# EAGLE board Geiger_Counter-Panel-v40 (EAGLE 6.6.0)
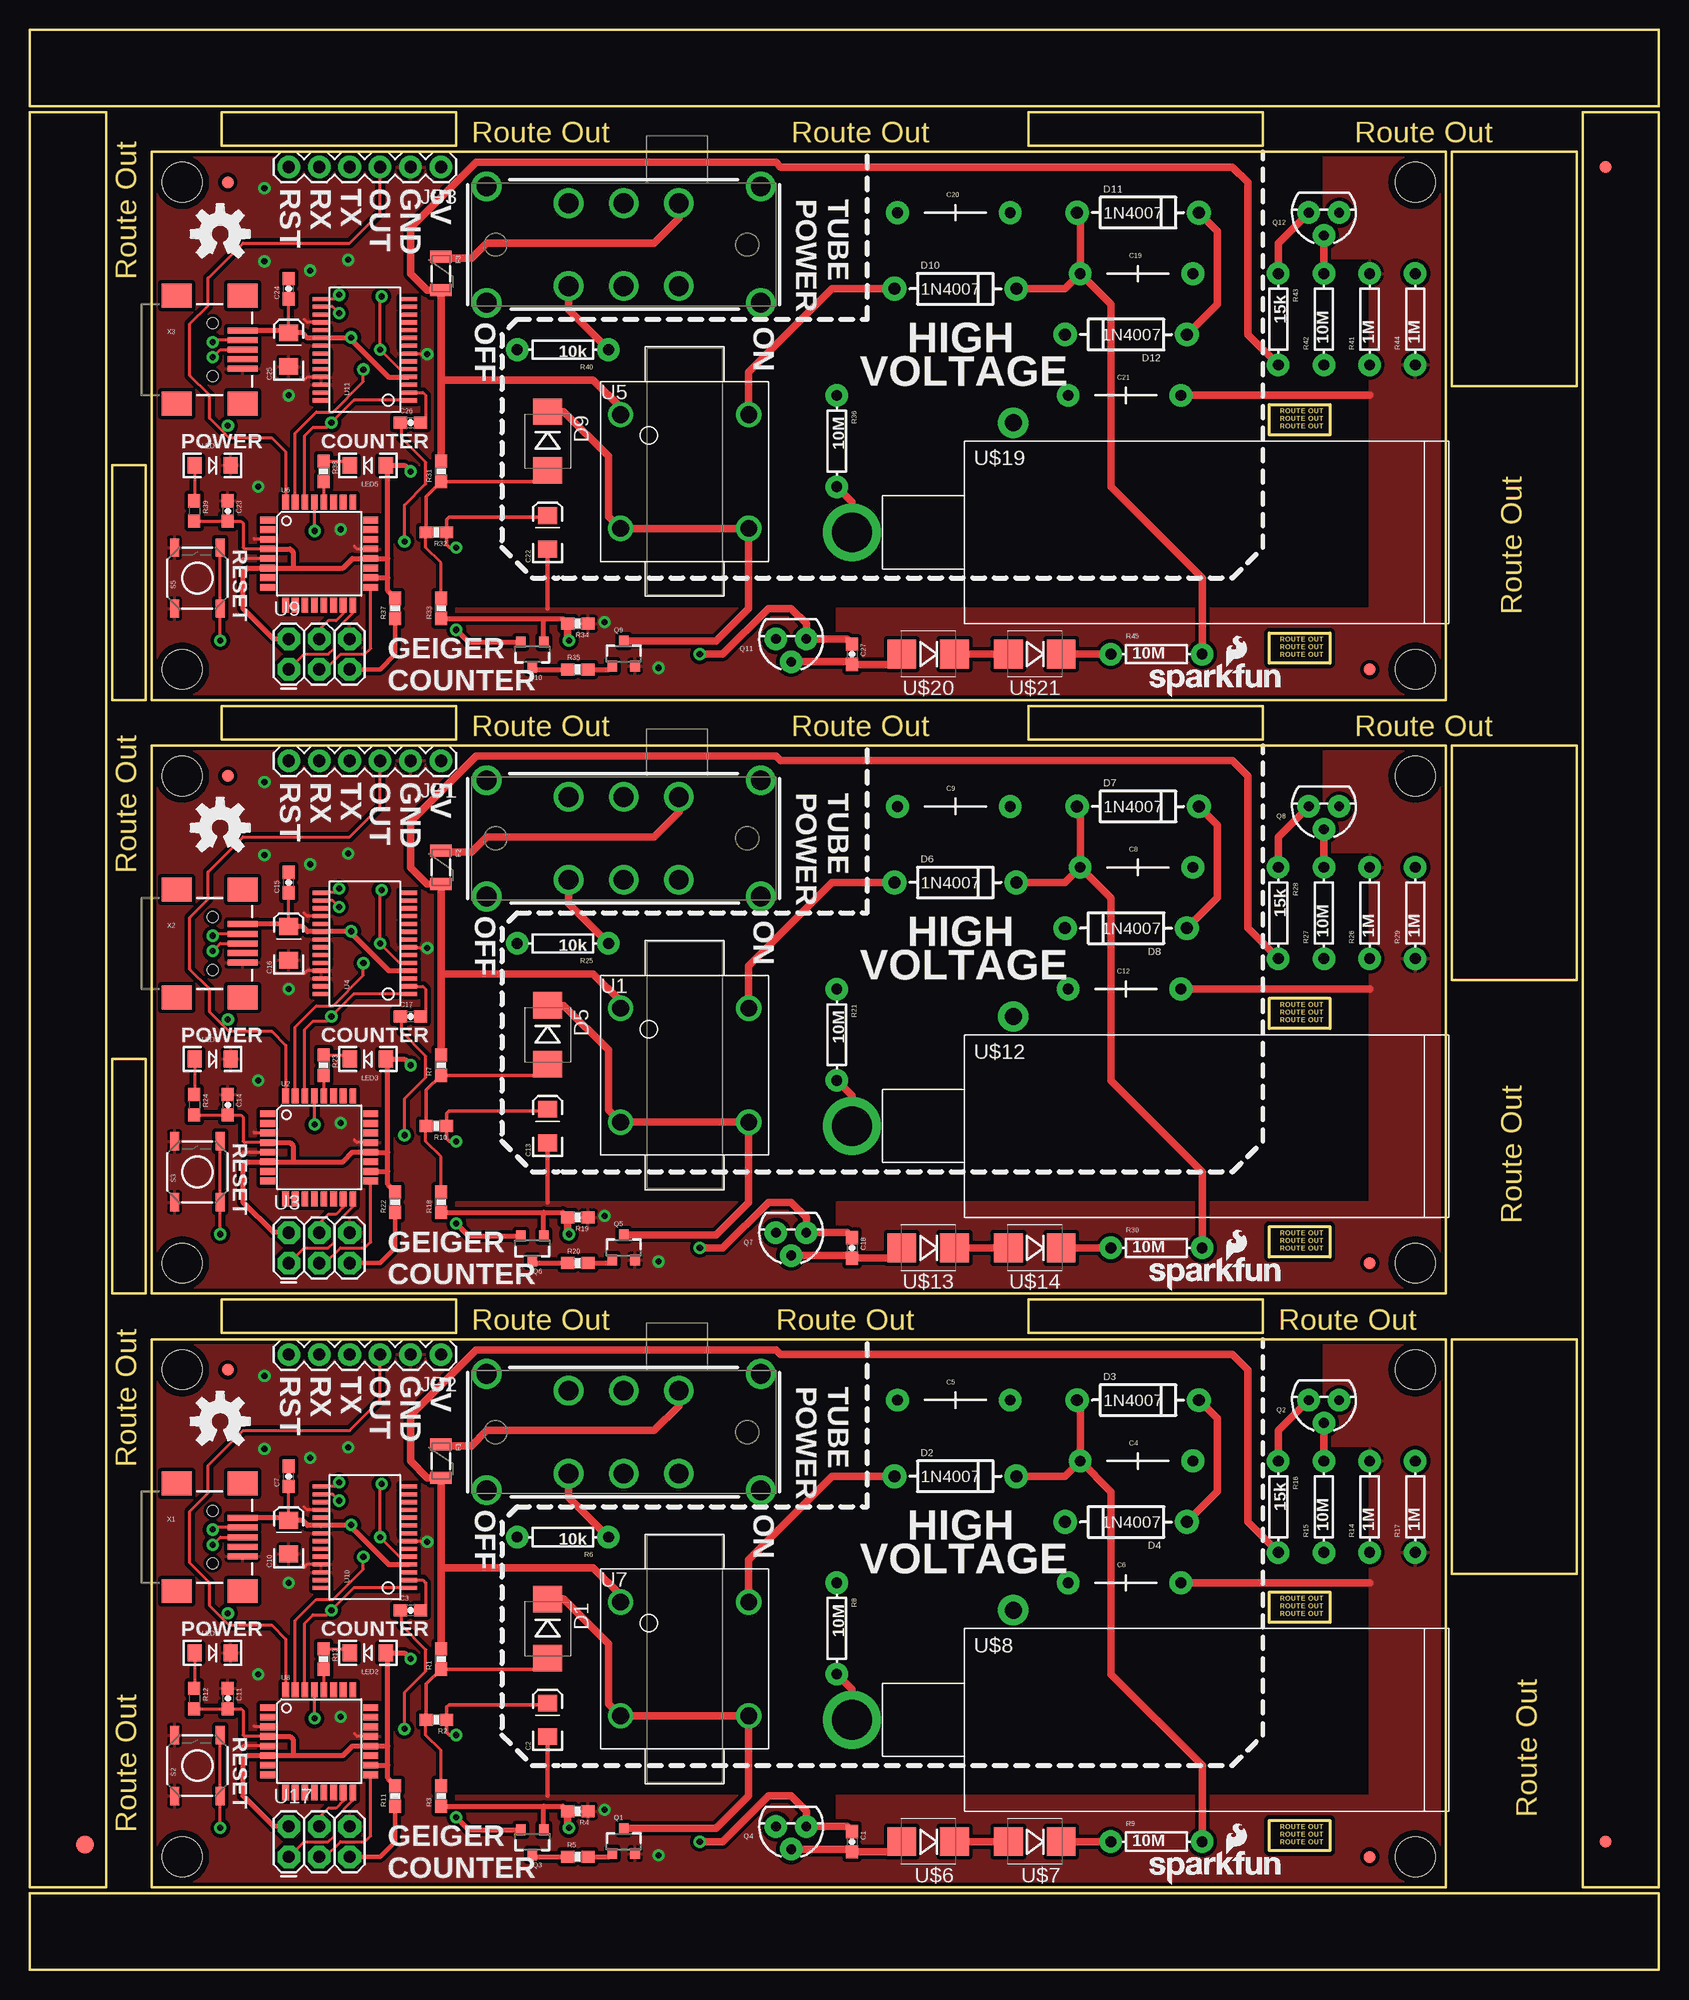
[diagram p0: board, top side]
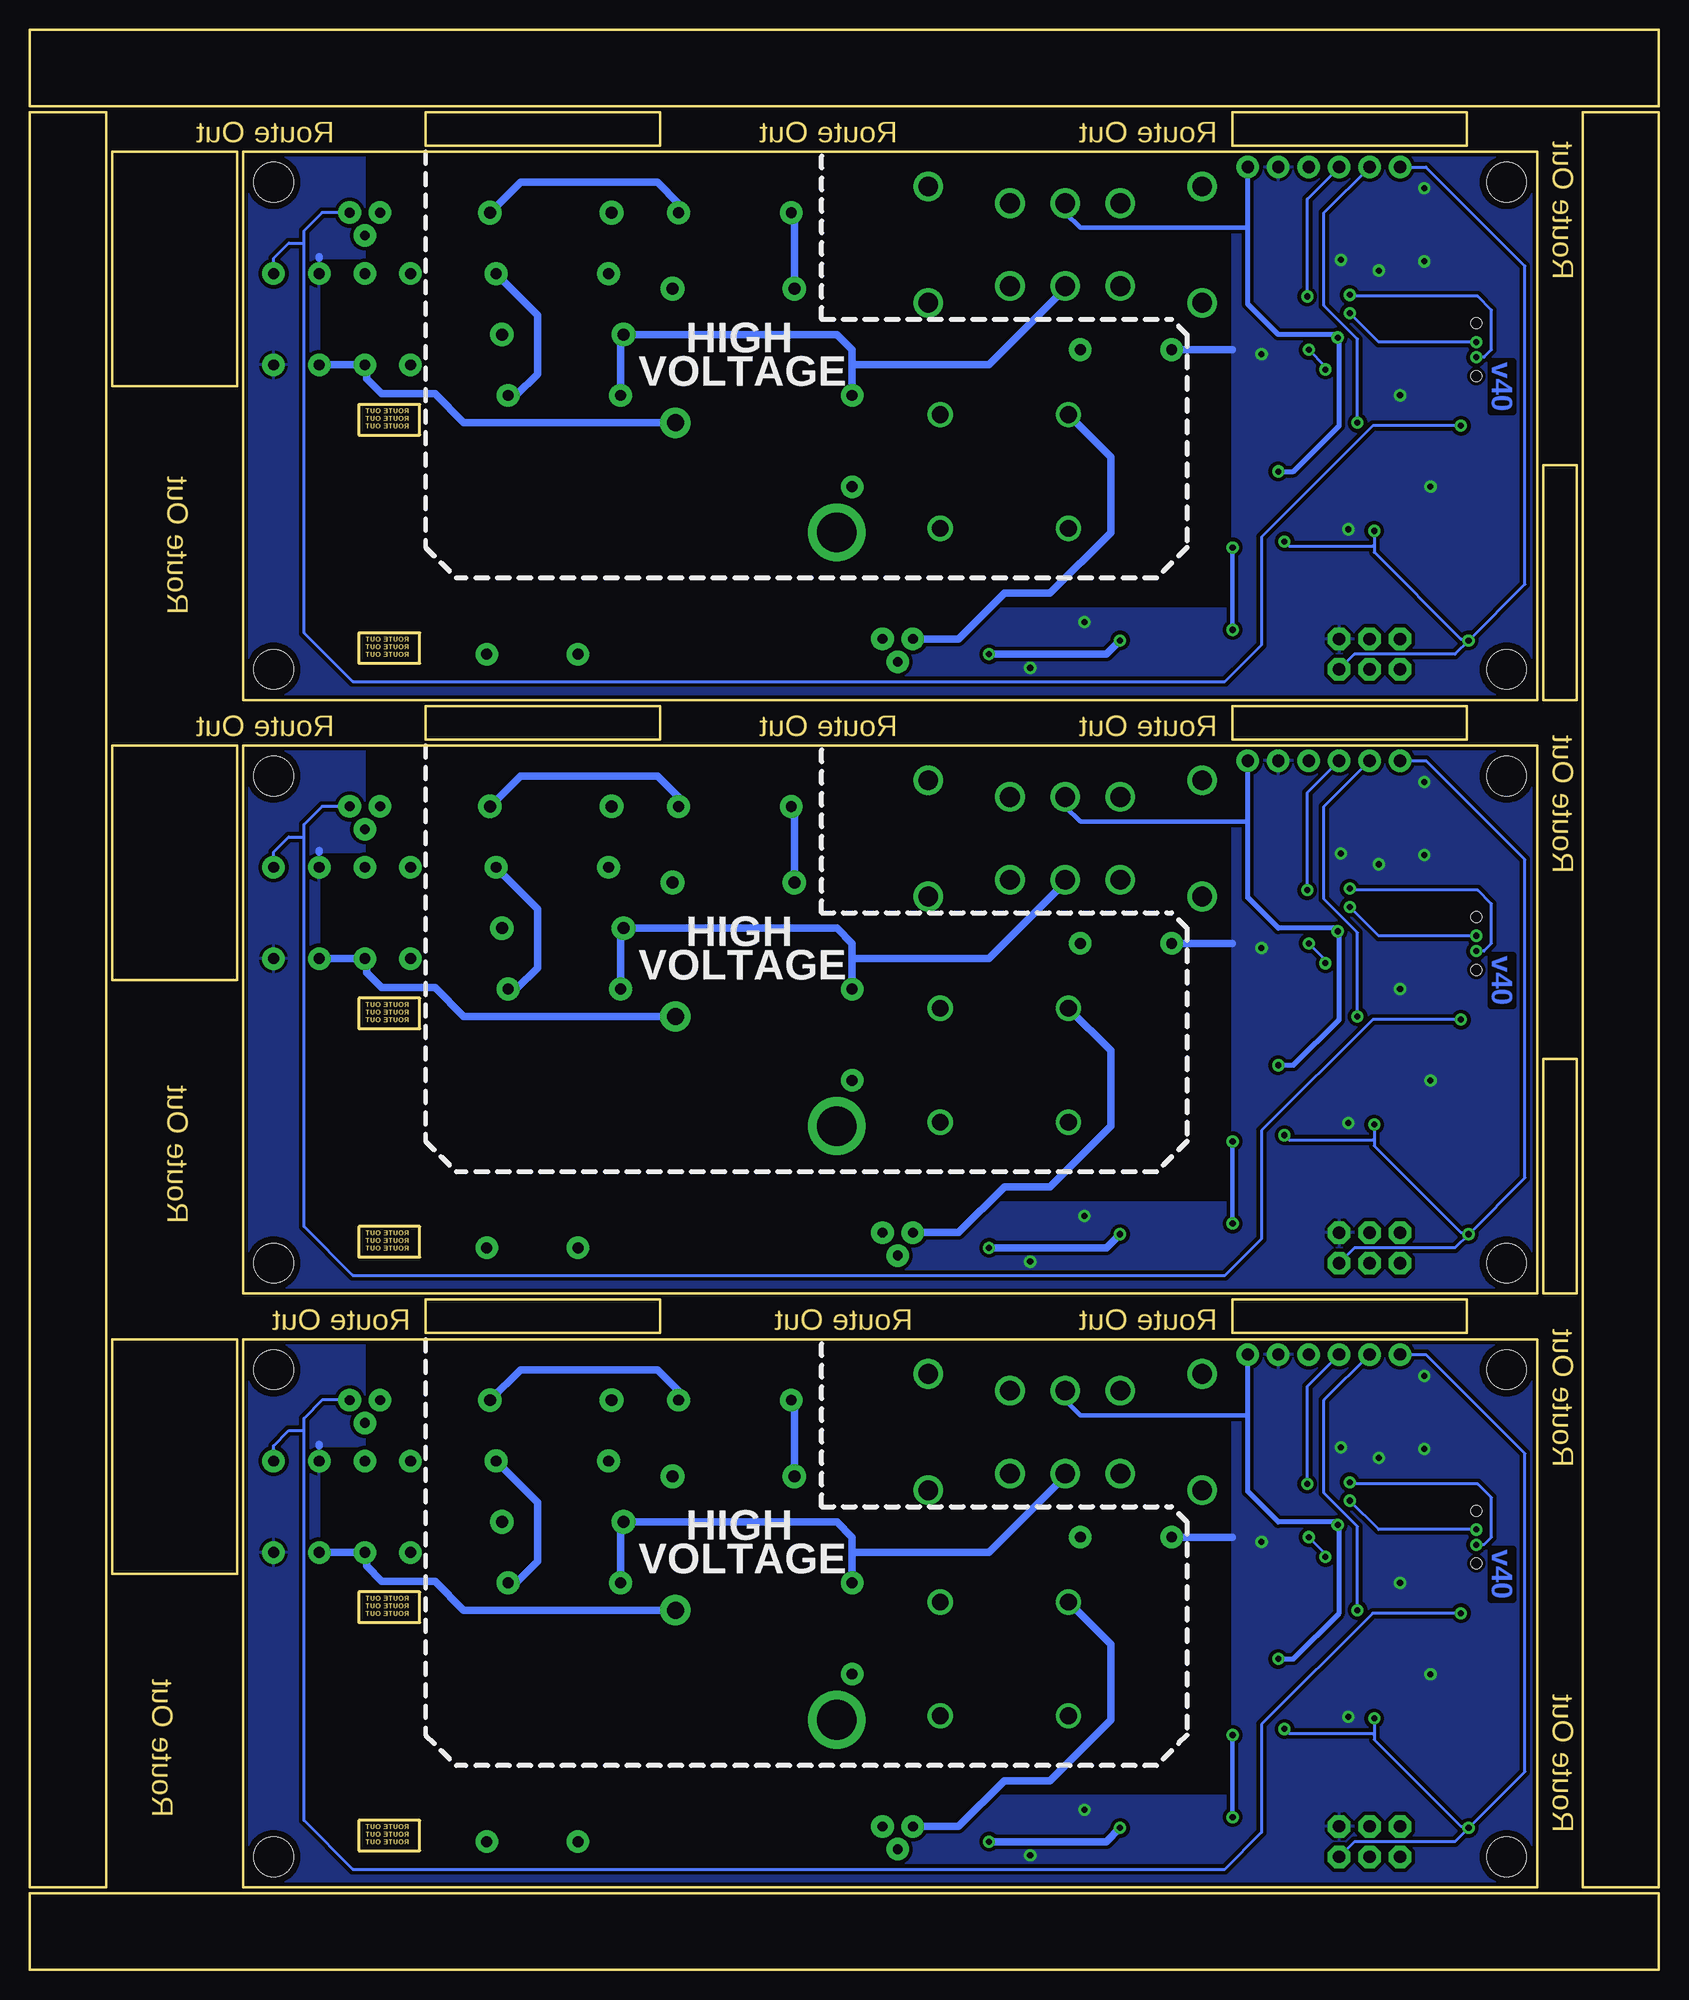
[diagram p1: board, bottom side, seen from below]

Size 135.89 x 161.8 mm. Coordinates in mm from the lower left corner, seen from the top.
Outline: 6.35,79.25 6.35,6.86 0,6.86 0,29.72
Outline: 135.89,79.25 135.89,6.86 129.54,6.86 129.54,29.72
Outline: 129.54,25.91 129.54,154.94 135.89,154.94 135.89,75.44
Outline: 0,23.37 0,154.94 6.35,154.94 6.35,72.9
Outline: 82.55,0 0,0 0,6.35 33.02,6.35
Outline: 82.55,155.45 0,155.45 0,161.8 33.02,161.8
Outline: 29.21,161.8 135.89,161.8 135.89,155.45 78.74,155.45
Outline: 27.69,6.35 135.89,6.35 135.89,0 77.22,0
Outline: 10.16,6.86 118.11,6.86 118.11,52.58 10.16,52.58 10.16,6.86
Outline: 103.38,31.5 108.46,31.5 108.46,28.96 103.38,28.96 103.38,31.5
Outline: 103.38,12.45 108.46,12.45 108.46,9.91 103.38,9.91 103.38,12.45
Outline: 10.16,56.39 118.11,56.39 118.11,102.11 10.16,102.11 10.16,56.39
Outline: 103.38,81.03 108.46,81.03 108.46,78.49 103.38,78.49 103.38,81.03
Outline: 103.38,61.98 108.46,61.98 108.46,59.44 103.38,59.44 103.38,61.98
Outline: 10.16,105.92 118.11,105.92 118.11,151.64 10.16,151.64 10.16,105.92
Outline: 103.38,130.56 108.46,130.56 108.46,128.02 103.38,128.02 103.38,130.56
Outline: 103.38,111.51 108.46,111.51 108.46,108.97 103.38,108.97 103.38,111.51
Outline: 118.62,132.08 129.03,132.08 129.03,151.64 118.62,151.64 118.62,132.08
Outline: 118.62,82.55 129.03,82.55 129.03,102.11 118.62,102.11 118.62,82.55
Outline: 118.62,33.02 129.03,33.02 129.03,52.58 118.62,52.58 118.62,33.02
Outline: 102.87,152.15 102.87,154.94 83.31,154.94 83.31,152.15 102.87,152.15
Outline: 102.87,102.62 102.87,105.41 83.31,105.41 83.31,102.62 102.87,102.62
Outline: 102.87,53.09 102.87,55.88 83.31,55.88 83.31,53.09 102.87,53.09
Outline: 35.56,53.09 35.56,55.88 16,55.88 16,53.09 35.56,53.09
Outline: 35.56,102.62 35.56,105.41 16,105.41 16,102.62 35.56,102.62
Outline: 35.56,152.15 35.56,154.94 16,154.94 16,152.15 35.56,152.15
Outline: 6.86,105.92 9.65,105.92 9.65,125.48 6.86,125.48 6.86,105.92
Outline: 6.86,56.39 9.65,56.39 9.65,75.95 6.86,75.95 6.86,56.39
Copper layers (1*16): Top 0.035mm / dielectric 1.5mm / Bottom 0.035mm
Design rules "SparkFun-2-layer": minimum track width 7mil, minimum drill 15mil, track to track 8mil, track to pad 8mil, pad to pad 8mil, via to via 8mil, smd to smd 8mil, copper to edge 8mil, drill to drill 8mil, minimum pad ring 12mil, minimum via ring 10mil, stop-mask expansion 4mil, vias tented up to drill 20mil, thermal gap 10mil

## Footprints (pad centres in the part's own frame; a part is rotated, then mirrored left to right if it is on the bottom)
0603-CAP = smd 1.1 x 1: 1 -0.85,0; 2 0.85,0
EIA3216 = smd 1.4 x 1.6: A 1.4,0; C -1.4,0
CAP-PTH-LARGE = drill 0.9 pad 1.905: 1 -4.826,0; 2 4.572,0
DIODE-HV = smd 2.2 x 2.4: A 2.454,0; C -2.454,0
DIODE-1N4001 = drill 1 pad 1.981: A -5.08,0; C 5.08,0
FIDUCIAL-1.5X3 = smd 1.5 x 1.5: 1 0,0
FIDUCIAL-1X2 = smd 1 x 1: 1 0,0
PTC-1206 = smd 1 x 1.8: 1 -1.4,0; 2 1.4,0
1X06 = drill 1.016 pad 1.88: 1 0,0; 2 2.54,0; 3 5.08,0; 4 7.62,0; 5 10.16,0; 6 12.7,0
LED-1206 = smd 1.2 x 1.4: A -1.5,0; C 1.5,0
SOT23-3 = smd 0.8 x 0.9: 1 -0.95,-1; 2 0.95,-1; 3 0,1.1
TO-92 = drill 0.813 pad 1.88: 1 -1.27,0; 2 0,1.905; 3 1.27,0
0603-RES = smd 1.1 x 1: 1 -0.85,0; 2 0.85,0
AXIAL-0.3 = drill 0.9 pad 1.88: P$1 -3.81,0; P$2 3.81,0
0603 = smd 1.1 x 1: 1 -0.85,0; 2 0.85,0
GPI-152-3013 = drill 1.65: 10 -4.6,3.455; 11 -4.6,-3.455; 20 4.6,3.455; 21 4.6,-3.455; C@1 0,3.455; C@2 0,-3.455; P$7 11.43,4.85; P$8 -11.43,4.85; P$9 -11.43,-4.85; P$10 11.43,-4.85
TACTILE_SWITCH_SMD = smd 1.524 x 0.762: 1 -2.54,1.905; 2 2.54,1.905; 3 -2.54,-1.905; 4 2.54,-1.905
TRANSFORMER = drill 1.4: 1 -5.35,4.75; 2 -5.35,-4.75; 3 5.35,-4.75; 4 5.35,4.75
TQFP32-08 = smd 1.27 x 0.559: 1 -4.293,2.8; 2 -4.293,2; 3 -4.293,1.2; 4 -4.293,0.4; 5 -4.293,-0.4; 6 -4.293,-1.2; 7 -4.293,-2; 8 -4.293,-2.8; 17 4.293,-2.8; 18 4.293,-2; 19 4.293,-1.2; 20 4.293,-0.4; 21 4.293,0.4; 22 4.293,1.2; 23 4.293,2; 24 4.293,2.8 | smd 0.559 x 1.27: 9 -2.8,-4.293; 10 -2,-4.293; 11 -1.2,-4.293; 12 -0.4,-4.293; 13 0.4,-4.293; 14 1.2,-4.293; 15 2,-4.293; 16 2.8,-4.293; 25 2.8,4.293; 26 2,4.293; 27 1.2,4.293; 28 0.4,4.293; 29 -0.4,4.293; 30 -1.2,4.293; 31 -2,4.293; 32 -2.8,4.293
2X3 = drill 1.016 pad 1.88 octagon: 1 0,0; 2 0,2.54; 3 2.54,0; 4 2.54,2.54; 5 5.08,0; 6 5.08,2.54
SSOP28DB = smd 0.348 x 1.397: 1 -4.225,-3.656; 2 -3.575,-3.656; 3 -2.925,-3.656; 4 -2.275,-3.656; 5 -1.625,-3.656; 6 -0.975,-3.656; 7 -0.325,-3.656; 8 0.325,-3.656; 9 0.975,-3.656; 10 1.625,-3.656; 11 2.275,-3.656; 12 2.925,-3.656; 13 3.575,-3.656; 14 4.225,-3.656; 15 4.225,3.656; 16 3.575,3.656; 17 2.925,3.656; 18 2.275,3.656; 19 1.625,3.656; 20 0.975,3.656; 21 0.325,3.656; 22 -0.325,3.656; 23 -0.975,3.656; 24 -1.625,3.656; 25 -2.275,3.656; 26 -2.925,3.656; 27 -3.575,3.656; 28 -4.225,3.656
STAND-OFF = hole 3.302: 0,0
SMB-DIODE = smd 2.4 x 2.4: A 2.2,0; C -2.2,0
GEIGER_TUBE = drill 1.4 pad 2.54: GND 13.462,9.144 | drill 3.302 pad 4.826: VCC 0,0
USB-MINIB = smd 2.5 x 0.5: D+ 2.5,0; D- 2.5,0.8; GND 2.5,-1.6; ID 2.5,-0.8; VBUS 2.5,1.6 | smd 2.5 x 2: MTN1 -3,4.5; MTN2 2.5,4.5; MTN3 -3,-4.5; MTN4 2.5,-4.5 | hole 0.9: 0,2.2; 0,-2.2

## Placement (x,y rotation side)
C1  0.1uF  [0603-CAP]  68.58,10.67 270 top
C2  10uF  [EIA3216]  43.18,20.83 90 top
C3  0.1uF  [0603-CAP]  31.75,29.97 0 top
C4  0.01uF  [CAP-PTH-LARGE]  92.44,42.42 0 top
C5  0.01uF  [CAP-PTH-LARGE]  77.2,47.5 0 top
C6  0.01uF  [CAP-PTH-LARGE]  91.44,32.26 0 top
C7  0.1uF  [0603-CAP]  21.59,41.15 90 top
C8  0.01uF  [CAP-PTH-LARGE]  92.44,91.95 0 top
C9  0.01uF  [CAP-PTH-LARGE]  77.2,97.03 0 top
C10  10uF  [EIA3216]  21.59,36.07 90 top
C11  0.1uF  [0603-CAP]  16.51,22.61 270 top
C12  0.01uF  [CAP-PTH-LARGE]  91.44,81.79 0 top
C13  10uF  [EIA3216]  43.18,70.36 90 top
C14  0.1uF  [0603-CAP]  16.51,72.14 270 top
C15  0.1uF  [0603-CAP]  21.59,90.68 90 top
C16  10uF  [EIA3216]  21.59,85.6 90 top
C17  0.1uF  [0603-CAP]  31.75,79.5 0 top
C18  0.1uF  [0603-CAP]  68.58,60.2 270 top
C19  0.01uF  [CAP-PTH-LARGE]  92.44,141.48 0 top
C20  0.01uF  [CAP-PTH-LARGE]  77.2,146.56 0 top
C21  0.01uF  [CAP-PTH-LARGE]  91.44,131.32 0 top
C22  10uF  [EIA3216]  43.18,119.89 90 top
C23  0.1uF  [0603-CAP]  16.51,121.67 270 top
C24  0.1uF  [0603-CAP]  21.59,140.21 90 top
C25  10uF  [EIA3216]  21.59,135.13 90 top
C26  0.1uF  [0603-CAP]  31.75,129.03 0 top
C27  0.1uF  [0603-CAP]  68.58,109.73 270 top
D1  1N4007  [DIODE-HV]  43.18,28.45 270 top
D2  1N4007  [DIODE-1N4001]  77.2,41.15 0 top
D3  1N4007  [DIODE-1N4001]  92.44,47.5 0 top
D4  1N4007  [DIODE-1N4001]  91.44,37.34 180 top
D5  1N4007  [DIODE-HV]  43.18,77.98 270 top
D6  1N4007  [DIODE-1N4001]  77.2,90.68 0 top
D7  1N4007  [DIODE-1N4001]  92.44,97.03 0 top
D8  1N4007  [DIODE-1N4001]  91.44,86.87 180 top
D9  1N4007  [DIODE-HV]  43.18,127.51 270 top
D10  1N4007  [DIODE-1N4001]  77.2,140.21 0 top
D11  1N4007  [DIODE-1N4001]  92.44,146.56 0 top
D12  1N4007  [DIODE-1N4001]  91.44,136.4 180 top
E$1  [FIDUCIAL-1.5X3]  4.57,10.41 0 top
E$2  [FIDUCIAL-1X2]  131.44,10.67 0 top
E$3  [FIDUCIAL-1X2]  131.44,150.37 180 top
F1  PTCSMD  [PTC-1206]  34.29,42.42 270 top
F2  PTCSMD  [PTC-1206]  34.29,91.95 270 top
F3  PTCSMD  [PTC-1206]  34.29,141.48 270 top
FID1  FIDUCIAL1X2  [FIDUCIAL-1X2]  16.51,50.04 0 top
FID2  FIDUCIAL1X2  [FIDUCIAL-1X2]  111.76,9.4 0 top
FID3  FIDUCIAL1X2  [FIDUCIAL-1X2]  16.51,99.57 0 top
FID4  FIDUCIAL1X2  [FIDUCIAL-1X2]  111.76,58.93 0 top
FID5  FIDUCIAL1X2  [FIDUCIAL-1X2]  16.51,149.1 0 top
FID6  FIDUCIAL1X2  [FIDUCIAL-1X2]  111.76,108.46 0 top
JP1  debug  [1X06]  34.29,100.84 180 top
JP2  debug  [1X06]  34.29,51.31 180 top
JP3  debug  [1X06]  34.29,150.37 180 top
LED1  Red  [LED-1206]  15.24,26.42 0 top
LED2  Green  [LED-1206]  28.19,26.42 180 top
LED3  Green  [LED-1206]  28.19,75.95 180 top
LED4  Red  [LED-1206]  15.24,75.95 0 top
LED5  Green  [LED-1206]  28.19,125.48 180 top
LED6  Red  [LED-1206]  15.24,125.48 0 top
LOGO1  OSHW-LOGOM  [OSHW-LOGO-M]  15.88,45.72 0 top
LOGO2  SFE_LOGO_NAME_FLAME.1_INCH  [SFE_LOGO_NAME_FLAME_.1]  92.96,6.99 0 top
LOGO3  OSHW-LOGOM  [OSHW-LOGO-M]  15.88,95.25 0 top
LOGO4  SFE_LOGO_NAME_FLAME.1_INCH  [SFE_LOGO_NAME_FLAME_.1]  92.96,56.52 0 top
LOGO5  OSHW-LOGOM  [OSHW-LOGO-M]  15.88,144.78 0 top
LOGO6  SFE_LOGO_NAME_FLAME.1_INCH  [SFE_LOGO_NAME_FLAME_.1]  92.96,106.05 0 top
Q1  MPSA42  [SOT23-3]  49.53,10.67 0 top
Q2  MPSA18  [TO-92]  107.95,47.5 180 top
Q3  MMBT4403  [SOT23-3]  41.91,10.67 180 top
Q4  MPSA18  [TO-92]  63.5,11.94 180 top
Q5  MPSA42  [SOT23-3]  49.53,60.2 0 top
Q6  MMBT4403  [SOT23-3]  41.91,60.2 180 top
Q7  MPSA18  [TO-92]  63.5,61.47 180 top
Q8  MPSA18  [TO-92]  107.95,97.03 180 top
Q9  MPSA42  [SOT23-3]  49.53,109.73 0 top
Q10  MMBT4403  [SOT23-3]  41.91,109.73 180 top
Q11  MPSA18  [TO-92]  63.5,111 180 top
Q12  MPSA18  [TO-92]  107.95,146.56 180 top
R1  1k  [0603-RES]  34.29,25.91 90 top
R2  1k  [0603-RES]  33.91,20.83 180 top
R3  100k  [0603-RES]  34.29,14.48 90 top
R4  150k  [0603-RES]  45.72,13.21 180 top
R5  1.8k  [0603-RES]  45.72,9.4 0 top
R6  10k  [AXIAL-0.3]  44.45,36.07 180 top
R7  1k  [0603-RES]  34.29,75.44 90 top
R8  10M  [AXIAL-0.3]  67.31,28.45 270 top
R9  10M  [AXIAL-0.3]  93.98,10.67 0 top
R10  1k  [0603-RES]  33.91,70.36 180 top
R11  10k  [0603-RES]  30.48,14.48 90 top
R12  330  [0603]  13.72,22.61 270 top
R13  330  [0603-RES]  24.51,25.91 270 top
R14  1M  [AXIAL-0.3]  111.76,38.61 90 top
R15  10M  [AXIAL-0.3]  107.95,38.61 90 top
R16  15k  [AXIAL-0.3]  104.14,38.61 270 top
R17  1M  [AXIAL-0.3]  115.57,38.61 90 top
R18  100k  [0603-RES]  34.29,64.01 90 top
R19  150k  [0603-RES]  45.72,62.74 180 top
R20  1.8k  [0603-RES]  45.72,58.93 0 top
R21  10M  [AXIAL-0.3]  67.31,77.98 270 top
R22  10k  [0603-RES]  30.48,64.01 90 top
R23  330  [0603-RES]  24.51,75.44 270 top
R24  330  [0603]  13.72,72.14 270 top
R25  10k  [AXIAL-0.3]  44.45,85.6 180 top
R26  1M  [AXIAL-0.3]  111.76,88.14 90 top
R27  10M  [AXIAL-0.3]  107.95,88.14 90 top
R28  15k  [AXIAL-0.3]  104.14,88.14 270 top
R29  1M  [AXIAL-0.3]  115.57,88.14 90 top
R30  10M  [AXIAL-0.3]  93.98,60.2 0 top
R31  1k  [0603-RES]  34.29,124.97 90 top
R32  1k  [0603-RES]  33.91,119.89 180 top
R33  100k  [0603-RES]  34.29,113.54 90 top
R34  150k  [0603-RES]  45.72,112.27 180 top
R35  1.8k  [0603-RES]  45.72,108.46 0 top
R36  10M  [AXIAL-0.3]  67.31,127.51 270 top
R37  10k  [0603-RES]  30.48,113.54 90 top
R38  330  [0603-RES]  24.51,124.97 270 top
R39  330  [0603]  13.72,121.67 270 top
R40  10k  [AXIAL-0.3]  44.45,135.13 180 top
R41  1M  [AXIAL-0.3]  111.76,137.67 90 top
R42  10M  [AXIAL-0.3]  107.95,137.67 90 top
R43  15k  [AXIAL-0.3]  104.14,137.67 270 top
R44  1M  [AXIAL-0.3]  115.57,137.67 90 top
R45  10M  [AXIAL-0.3]  93.98,109.73 0 top
S1  SWITCH-DPDTGPI  [GPI-152-3013]  49.53,44.83 0 top
S2  Reset  [TACTILE_SWITCH_SMD]  13.97,17.02 90 top
S3  Reset  [TACTILE_SWITCH_SMD]  13.97,66.55 90 top
S4  SWITCH-DPDTGPI  [GPI-152-3013]  49.53,94.36 0 top
S5  Reset  [TACTILE_SWITCH_SMD]  13.97,116.08 90 top
S6  SWITCH-DPDTGPI  [GPI-152-3013]  49.53,143.89 0 top
U1  TRANSFORMERAUDIO  [TRANSFORMER]  54.61,75.44 0 top
U2  [TQFP32-08]  24.13,68.58 0 top
U3  AVR_SPI_PRG_6PTH  [2X3]  21.59,58.93 0 top
U4  FT232RL-BASICSSOP  [SSOP28DB]  27.94,85.6 90 top
U5  TRANSFORMERAUDIO  [TRANSFORMER]  54.61,124.97 0 top
U6  [TQFP32-08]  24.13,118.11 0 top
U7  TRANSFORMERAUDIO  [TRANSFORMER]  54.61,25.91 0 top
U8  [TQFP32-08]  24.13,19.05 0 top
U9  AVR_SPI_PRG_6PTH  [2X3]  21.59,108.46 0 top
U10  FT232RL-BASICSSOP  [SSOP28DB]  27.94,36.07 90 top
U11  FT232RL-BASICSSOP  [SSOP28DB]  27.94,135.13 90 top
U17  AVR_SPI_PRG_6PTH  [2X3]  21.59,9.4 0 top
U$1  STAND-OFF  [STAND-OFF]  12.7,9.4 0 top
U$2  STAND-OFF  [STAND-OFF]  12.7,50.04 0 top
U$3  STAND-OFF  [STAND-OFF]  115.57,50.04 0 top
U$4  STAND-OFF  [STAND-OFF]  115.57,9.4 0 top
U$5  STAND-OFF  [STAND-OFF]  12.7,58.93 0 top
U$6  DIODE-ZENERSMB  [SMB-DIODE]  74.93,10.67 180 top
U$7  DIODE-ZENERSMB  [SMB-DIODE]  83.82,10.67 180 top
U$8  GEIGER_TUBELND712  [GEIGER_TUBE]  68.58,20.83 0 top
U$9  STAND-OFF  [STAND-OFF]  12.7,99.57 0 top
U$10  STAND-OFF  [STAND-OFF]  115.57,99.57 0 top
U$11  STAND-OFF  [STAND-OFF]  115.57,58.93 0 top
U$12  GEIGER_TUBELND712  [GEIGER_TUBE]  68.58,70.36 0 top
U$13  DIODE-ZENERSMB  [SMB-DIODE]  74.93,60.2 180 top
U$14  DIODE-ZENERSMB  [SMB-DIODE]  83.82,60.2 180 top
U$15  STAND-OFF  [STAND-OFF]  12.7,108.46 0 top
U$16  STAND-OFF  [STAND-OFF]  12.7,149.1 0 top
U$17  STAND-OFF  [STAND-OFF]  115.57,149.1 0 top
U$18  STAND-OFF  [STAND-OFF]  115.57,108.46 0 top
U$19  GEIGER_TUBELND712  [GEIGER_TUBE]  68.58,119.89 0 top
U$20  DIODE-ZENERSMB  [SMB-DIODE]  74.93,109.73 180 top
U$21  DIODE-ZENERSMB  [SMB-DIODE]  83.82,109.73 180 top
X1  USBSMD  [USB-MINIB]  15.24,36.07 0 top
X2  USBSMD  [USB-MINIB]  15.24,85.6 0 top
X3  USBSMD  [USB-MINIB]  15.24,135.13 0 top

## Library data of the parts
C1 C3 C7 C11 C14 C15 C17 C18 C23 C24 C26 C27 = SparkFun-Capacitors; PROD_ID: CAP-00810
C2 C4-C6 C8-C10 C12 C13 C16 C19-C22 C25 D1-D12 F1-F3 JP1-JP3 LED1-LED6 Q1-Q12 R6 R8 R9 R14-R17 R21 R25-R30 R36 R40-R45 S1-S6 U1 U3-U5 U7 U9-U11 U17 U$1-U$5 U$8-U$12 U$15-U$19 X1-X3 = SparkFun
E$1 = SparkFun-Retired
E$2 E$3 FID1-FID6 LOGO1-LOGO6 = SparkFun-Aesthetics
R1 R2 R7 R10 R31 R32 = SparkFun-Resistors; PROD_ID: RES-07856
R3 R18 R33 = SparkFun-Resistors; PROD_ID: RES-07828
R4 R19 R34 = SparkFun-Resistors; PROD_ID: RES-09117
R5 R20 R35 = SparkFun-Resistors; PROD_ID: RES-09119
R11 R22 R37 = SparkFun-Resistors; PROD_ID: RES-00824
R12 R24 R39 = SparkFun-Resistors; PROD_ID: RES-08270
R13 R23 R38 = SparkFun-Resistors; PROD_ID: RES-00818
U2 U6 U8 = SparkFun-DigitalIC; PROD_ID: IC-09069
U$6 U$7 U$13 U$14 U$20 U$21 = SparkFun-DiscreteSemi

## Nets
5V: C7.1 C10.A C11.2 JP2.1 LED2.A R11.2 R12.2 S1.C@1 U8.4 U8.6 U8.18 U8.20 U10.4 U10.20 U17.2 X1.VBUS
5V1: C14.2 C15.1 C16.A JP1.1 LED3.A R22.2 R24.2 S4.C@1 U2.4 U2.6 U2.18 U2.20 U3.2 U4.4 U4.20 X2.VBUS
5V2: C23.2 C24.1 C25.A JP3.1 LED5.A R37.2 R39.2 S6.C@1 U6.4 U6.6 U6.18 U6.20 U9.2 U11.4 U11.20 X3.VBUS
DTR: C3.2 U10.2
DTR1: C17.2 U4.2
DTR2: C26.2 U11.2
GND: C2.C C4.2 C6.2 C10.C C11.1 JP2.2 LED1.C Q1.2 R4.1 R6.P$2 R14.P$2 R17.P$1 S2.1 S2.2 U8.3 U8.5 U8.21 U10.7 U10.18 U10.21 U10.25 U10.26 U17.6 X1.GND
GND1: C8.2 C12.2 C13.C C14.1 C16.C JP1.2 LED4.C Q5.2 R19.1 R25.P$2 R26.P$2 R29.P$1 S3.1 S3.2 U2.3 U2.5 U2.21 U3.6 U4.7 U4.18 U4.21 U4.25 U4.26 X2.GND
GND2: C19.2 C21.2 C22.C C23.1 C25.C JP3.2 LED6.C Q9.2 R34.1 R40.P$2 R41.P$2 R44.P$1 S5.1 S5.2 U6.3 U6.5 U6.21 U9.6 U11.7 U11.18 U11.21 U11.25 U11.26 X3.GND
HV: C6.1 D4.C R8.P$1 S1.C@2
HV1: C12.1 D8.C R21.P$1 S4.C@2
HV2: C21.1 D12.C R36.P$1 S6.C@2
MCU_RX: JP2.5 U8.30 U10.1
MCU_RX1: JP1.5 U2.30 U4.1
MCU_RX2: JP3.5 U6.30 U11.1
MCU_TX: JP2.4 U8.31 U10.5
MCU_TX1: JP1.4 U2.31 U4.5
MCU_TX2: JP3.4 U6.31 U11.5
MISO: U8.16 U17.1
MISO1: U2.16 U3.1
MISO2: U6.16 U9.1
MOSI: U8.15 U17.4
MOSI1: U2.15 U3.4
MOSI2: U6.15 U9.4
N$1: F1.1 S1.20
N$2: D1.A R1.1 R2.2 R3.2
N$3: R14.P$1 R15.P$1 U$8.GND
N$4: C2.A Q3.2 R2.1
N$5: Q2.2 R15.P$2
N$6: Q3.3 R5.1
N$7: R6.P$1 S1.11
N$8: Q2.3 R16.P$1
N$9: Q1.1 R5.2
N$10: D1.C Q1.3 U7.2 U7.3
N$11: C4.1 D2.C D3.A R9.P$2
N$12: C5.2 D3.C D4.A
N$13: C7.2
N$14: R8.P$2 U$8.VCC
N$15: U10.16 X1.D-
N$16: D5.A R7.1 R10.2 R18.2
N$17: U10.15 X1.D+
N$18: R9.P$1 U$7.C
N$19: LED1.A R12.1
N$20: LED2.C R13.1
N$21: R13.2 U8.28
N$22: U$6.C U$7.A
N$23: C1.2 Q4.2 U$6.A
N$24: C13.A Q6.2 R10.1
N$25: Q6.3 R20.1
N$26: Q5.1 R20.2
N$27: D5.C Q5.3 U1.2 U1.3
N$28: C8.1 D6.C D7.A R30.P$2
N$29: C9.2 D7.C D8.A
N$30: R21.P$2 U$12.VCC
N$31: LED3.C R23.1
N$32: R23.2 U2.28
N$33: U4.16 X2.D-
N$34: U4.15 X2.D+
N$35: LED4.A R24.1
N$36: R25.P$1 S4.11
N$37: F2.1 S4.20
N$38: R26.P$1 R27.P$1 U$12.GND
N$39: Q8.2 R27.P$2
N$40: Q8.3 R28.P$1
N$41: R30.P$1 U$14.C
N$42: U$13.C U$14.A
N$43: C18.2 Q7.2 U$13.A
N$44: C15.2
N$45: D9.A R31.1 R32.2 R33.2
N$46: C22.A Q10.2 R32.1
N$47: Q10.3 R35.1
N$48: Q9.1 R35.2
N$49: D9.C Q9.3 U5.2 U5.3
N$50: C19.1 D10.C D11.A R45.P$2
N$51: C20.2 D11.C D12.A
N$52: R36.P$2 U$19.VCC
N$53: LED5.C R38.1
N$54: R38.2 U6.28
N$55: U11.16 X3.D-
N$56: U11.15 X3.D+
N$57: LED6.A R39.1
N$58: R40.P$1 S6.11
N$59: F3.1 S6.20
N$60: R41.P$1 R42.P$1 U$19.GND
N$61: Q12.2 R42.P$2
N$62: Q12.3 R43.P$1
N$63: R45.P$1 U$21.C
N$64: U$20.C U$21.A
N$65: C27.2 Q11.2 U$20.A
N$66: C24.2
OSC1: C5.1 D2.A U7.4
OSC2: C1.1 Q3.1 Q4.1 R3.1 R4.2
OSC3: C9.1 D6.A U1.4
OSC4: C18.1 Q6.1 Q7.1 R18.1 R19.2
OSC5: C20.1 D10.A U5.4
OSC6: C27.1 Q10.1 Q11.1 R33.1 R34.2
OUT: JP2.3 Q2.1 R17.P$2 U8.32
OUT1: JP1.3 Q8.1 R29.P$2 U2.32
OUT2: JP3.3 Q12.1 R44.P$2 U6.32
RST: C3.1 JP2.6 R11.1 S2.3 S2.4 U8.29 U17.5
RST1: C17.1 JP1.6 R22.1 S3.3 S3.4 U2.29 U3.5
RST2: C26.1 JP3.6 R37.1 S5.3 S5.4 U6.29 U9.5
SCK: U8.17 U17.3
SCK1: U2.17 U3.3
SCK2: U6.17 U9.3
VCC: F1.2 Q4.3 R1.2 R16.P$2 U7.1
VCC1: F2.2 Q7.3 R7.2 R28.P$2 U1.1
VCC2: F3.2 Q11.3 R31.2 R43.P$2 U5.1

## Tracks (layer width: path | path; a pad name or v marks a point on that pad's centre or on a via)
5V  (via drill 0.51)
  Top 0.254: 21.39,37.67 C10.A C7.1 | 26.76,37.04 v26.8,37.08 26.8,36.92 | R12.2 C11.2 17.61,21.76 17.78,21.59 17.78,19.56 17.89,19.45 U8.4
  Top 0.406: 21.39,37.67 X1.VBUS | C10.A 22.73,37.47 23.16,37.04 U10.20 26.76,37.04 | U10.4 29.92,33.79 26.8,36.92 | 30.48,15.11 R11.2 29.84,15.96 29.84,17.05 | U17.2 20.32,11.94 17.78,14.48 17.78,17.53 18.1,17.85 U8.6 22.05,17.86 | 29.84,17.05 29.84,18.65 | 28.45,17.02 U8.18 29.84,17.05 | 29.84,18.65 U8.20 26.91,18.65 26.11,17.86 22.05,17.86 | v31.75,25.91 31.24,26.42 LED2.A 29.84,26.27 29.84,18.65 | U8.4 21.7,19.45 21.95,19.2 21.95,17.96 22.05,17.86
  Bottom 0.381: S1.C@1 49.53,47.5 48.26,46.23 34.29,46.23
  Bottom 0.406: v31.75,25.91 30.48,25.91 26.67,29.72 26.67,36.96 v26.8,37.08 27.05,37.34 31.75,37.34 34.29,39.88 34.29,46.23 JP2.1
5V1  (via drill 0.51)
  Top 0.254: 21.39,87.2 C16.A C15.1 | 26.76,86.57 v26.8,86.61 26.8,86.45 | R24.2 C14.2 17.61,71.29 17.78,71.12 17.78,69.09 17.89,68.98 U2.4
  Top 0.406: 21.39,87.2 X2.VBUS | C16.A 22.73,87 23.16,86.57 U4.20 26.76,86.57 | U4.4 29.92,83.32 26.8,86.45 | 30.48,64.64 R22.2 29.84,65.49 29.84,66.58 | U3.2 20.32,61.47 17.78,64.01 17.78,67.06 18.1,67.38 U2.6 22.05,67.39 | 29.84,66.58 29.84,68.18 | 28.45,66.55 U2.18 29.84,66.58 | 29.84,68.18 U2.20 26.91,68.18 26.11,67.39 22.05,67.39 | v31.75,75.44 31.24,75.95 LED3.A 29.84,75.8 29.84,68.18 | U2.4 21.7,68.98 21.95,68.73 21.95,67.49 22.05,67.39
  Bottom 0.381: S4.C@1 49.53,97.03 48.26,95.76 34.29,95.76
  Bottom 0.406: v31.75,75.44 30.48,75.44 26.67,79.25 26.67,86.49 v26.8,86.61 27.05,86.87 31.75,86.87 34.29,89.41 34.29,95.76 JP1.1
5V2  (via drill 0.51)
  Top 0.254: 21.39,136.73 C25.A C24.1 | 26.76,136.1 v26.8,136.14 26.8,135.98 | R39.2 C23.2 17.61,120.82 17.78,120.65 17.78,118.62 17.89,118.51 U6.4
  Top 0.406: 21.39,136.73 X3.VBUS | C25.A 22.73,136.53 23.16,136.1 U11.20 26.76,136.1 | U11.4 29.92,132.85 26.8,135.98 | 30.48,114.17 R37.2 29.84,115.02 29.84,116.11 | U9.2 20.32,111 17.78,113.54 17.78,116.59 18.1,116.91 U6.6 22.05,116.92 | 29.84,116.11 29.84,117.71 | 28.45,116.08 U6.18 29.84,116.11 | 29.84,117.71 U6.20 26.91,117.71 26.11,116.92 22.05,116.92 | v31.75,124.97 31.24,125.48 LED5.A 29.84,125.33 29.84,117.71 | U6.4 21.7,118.51 21.95,118.26 21.95,117.02 22.05,116.92
  Bottom 0.381: S6.C@1 49.53,146.56 48.26,145.29 34.29,145.29
  Bottom 0.406: v31.75,124.97 30.48,124.97 26.67,128.78 26.67,136.02 v26.8,136.14 27.05,136.4 31.75,136.4 34.29,138.94 34.29,145.29 JP3.1
DTR
  Top 0.254: U10.2 32.78,32.49 33.02,32.26 33.02,30.39 C3.2
DTR1
  Top 0.254: U4.2 32.78,82.02 33.02,81.79 33.02,79.92 C17.2
DTR2
  Top 0.254: U11.2 32.78,131.55 33.02,131.32 33.02,129.45 C26.2
GND  (via drill 0.51)
  Top 0.254: U8.3 18.74,20.25 18.67,20.32 | U8.5 17.76,18.65 17.65,18.54 | U8.21 27.29,19.45 27.05,19.68 | U10.18 23.12,38.34 22.86,38.61 | U10.25 23.12,33.79 22.86,33.53 | U10.7 33.09,35.74 v33.15,35.69
  Top 0.356: 43.18,14.48 C2.C
  Top 0.61: C6.2 111.76,32.26
  Bottom 0.61: 35.56,36.07 R6.P$2 | 111.76,43.69 111.76,43.81 | C6.2 95.33,32.26 93.55,34.04 93.55,38.95 C4.2
  other vias: 25.91,21.08 21.59,32.26 52.45,9.53 19.56,49.53 19.56,43.43 26.54,43.56 23.37,42.67 47.93,13.34 19.05,24.64
  pour Bottom (isolate 0.305): 10.16,52.58 35.56,52.58 35.56,6.86 10.16,6.86
  pour Top (isolate 0.305): 10.16,52.58 10.16,6.86 35.56,6.86 35.56,52.58
  pour Top (isolate 0.305): 35.56,6.86 35.56,14.48 68.58,14.48 68.58,6.86
  pour Bottom (isolate 0.305): 35.56,6.86 35.56,14.48 68.58,14.48 68.58,6.86
  pour Bottom (isolate 0.305): 10.16,14.48 111.76,14.48 111.76,43.69 107.95,43.69 107.95,52.58 118.11,52.58 118.11,6.86 10.16,6.86
  pour Top (isolate 0.305): 67.31,14.48 111.76,14.48 111.76,43.69 107.95,43.69 107.95,52.58 118.11,52.58 118.11,6.86 67.31,6.86
GND1  (via drill 0.51)
  Top 0.254: U2.3 18.74,69.78 18.67,69.85 | U2.5 17.76,68.18 17.65,68.07 | U2.21 27.29,68.98 27.05,69.22 | U4.18 23.12,87.87 22.86,88.14 | U4.25 23.12,83.32 22.86,83.06 | U4.7 33.09,85.27 v33.15,85.22
  Top 0.356: 43.18,64.01 C13.C
  Top 0.61: C12.2 111.76,81.79
  Bottom 0.61: 35.56,85.6 R25.P$2 | 111.76,93.22 111.76,93.34 | C12.2 95.33,81.79 93.55,83.57 93.55,88.48 C8.2
  other vias: 25.91,70.61 21.59,81.79 52.45,59.05 19.56,99.06 19.56,92.96 26.54,93.09 23.37,92.2 47.93,62.87 19.05,74.17
  pour Bottom (isolate 0.305): 10.16,102.11 35.56,102.11 35.56,56.39 10.16,56.39
  pour Top (isolate 0.305): 10.16,102.11 10.16,56.39 35.56,56.39 35.56,102.11
  pour Top (isolate 0.305): 35.56,56.39 35.56,64.01 68.58,64.01 68.58,56.39
  pour Bottom (isolate 0.305): 35.56,56.39 35.56,64.01 68.58,64.01 68.58,56.39
  pour Bottom (isolate 0.305): 10.16,64.01 111.76,64.01 111.76,93.22 107.95,93.22 107.95,102.11 118.11,102.11 118.11,56.39 10.16,56.39
  pour Top (isolate 0.305): 67.31,64.01 111.76,64.01 111.76,93.22 107.95,93.22 107.95,102.11 118.11,102.11 118.11,56.39 67.31,56.39
GND2  (via drill 0.51)
  Top 0.254: U6.3 18.74,119.31 18.67,119.38 | U6.5 17.76,117.71 17.65,117.6 | U6.21 27.29,118.51 27.05,118.75 | U11.18 23.12,137.4 22.86,137.67 | U11.25 23.12,132.85 22.86,132.59 | U11.7 33.09,134.8 v33.15,134.75
  Top 0.356: 43.18,113.54 C22.C
  Top 0.61: C21.2 111.76,131.32
  Bottom 0.61: 35.56,135.13 R40.P$2 | 111.76,142.75 111.76,142.88 | C21.2 95.33,131.32 93.55,133.1 93.55,138.01 C19.2
  other vias: 25.91,120.14 21.59,131.32 52.45,108.58 19.56,148.59 19.56,142.49 26.54,142.62 23.37,141.73 47.93,112.39 19.05,123.7
  pour Bottom (isolate 0.305): 10.16,151.64 35.56,151.64 35.56,105.92 10.16,105.92
  pour Top (isolate 0.305): 10.16,151.64 10.16,105.92 35.56,105.92 35.56,151.64
  pour Top (isolate 0.305): 35.56,105.92 35.56,113.54 68.58,113.54 68.58,105.92
  pour Bottom (isolate 0.305): 35.56,105.92 35.56,113.54 68.58,113.54 68.58,105.92
  pour Bottom (isolate 0.305): 10.16,113.54 111.76,113.54 111.76,142.75 107.95,142.75 107.95,151.64 118.11,151.64 118.11,105.92 10.16,105.92
  pour Top (isolate 0.305): 67.31,113.54 111.76,113.54 111.76,142.75 107.95,142.75 107.95,151.64 118.11,151.64 118.11,105.92 67.31,105.92
HV
  Bottom 0.61: S1.C@2 49.53,41.15 55.88,34.8 67.31,34.8 | C6.1 86.61,37.08 D4.C 68.58,37.34 67.31,36.07 67.31,34.8 | R8.P$1 67.31,34.8
HV1
  Bottom 0.61: S4.C@2 49.53,90.68 55.88,84.33 67.31,84.33 | C12.1 86.61,86.61 D8.C 68.58,86.87 67.31,85.6 67.31,84.33 | R21.P$1 67.31,84.33
HV2
  Bottom 0.61: S6.C@2 49.53,140.21 55.88,133.86 67.31,133.86 | C21.1 86.61,136.14 D12.C 68.58,136.4 67.31,135.13 67.31,133.86 | R36.P$1 67.31,133.86
MCU_RX  (via drill 0.51)
  Top 0.254: U8.30 22.93,28.9 23.62,29.59 24.77,29.59 v25.15,29.97 27.02,31.84 U10.1
  Bottom 0.254: v25.15,29.97 25.15,36.96 27.94,39.75 27.94,47.5 JP2.5 | v25.15,29.97 25.27,29.84 | v25.15,29.97 25.15,29.84
MCU_RX1  (via drill 0.51)
  Top 0.254: U2.30 22.93,78.43 23.62,79.12 24.77,79.12 v25.15,79.5 27.02,81.37 U4.1
  Bottom 0.254: v25.15,79.5 25.15,86.49 27.94,89.28 27.94,97.03 JP1.5 | v25.15,79.5 25.27,79.38 | v25.15,79.5 25.15,79.38
MCU_RX2  (via drill 0.51)
  Top 0.254: U6.30 22.93,127.96 23.62,128.65 24.77,128.65 v25.15,129.03 27.02,130.9 U11.1
  Bottom 0.254: v25.15,129.03 25.15,136.02 27.94,138.81 27.94,146.56 JP3.5 | v25.15,129.03 25.27,128.91 | v25.15,129.03 25.15,128.91
MCU_TX  (via drill 0.51)
  Top 0.254: U10.5 30.84,34.44 v29.21,36.07 29.21,40.39 v29.34,40.51 | U8.31 22.13,29.11 23.88,30.86 25.27,30.86 27.81,33.4 v27.81,34.42
  Bottom 0.254: v27.81,34.42 27.81,34.67 v29.21,36.07 | v29.34,40.51 29.34,48.64 JP2.4
MCU_TX1  (via drill 0.51)
  Top 0.254: U4.5 30.84,83.97 v29.21,85.6 29.21,89.92 v29.34,90.04 | U2.31 22.13,78.64 23.88,80.39 25.27,80.39 27.81,82.93 v27.81,83.95
  Bottom 0.254: v27.81,83.95 27.81,84.2 v29.21,85.6 | v29.34,90.04 29.34,98.17 JP1.4
MCU_TX2  (via drill 0.51)
  Top 0.254: U11.5 30.84,133.5 v29.21,135.13 29.21,139.45 v29.34,139.57 | U6.31 22.13,128.18 23.88,129.92 25.27,129.92 27.81,132.46 v27.81,133.48
  Bottom 0.254: v27.81,133.48 27.81,133.73 v29.21,135.13 | v29.34,139.57 29.34,147.7 JP3.4
MISO
  Top 0.254: U17.1 22.86,10.67 24.89,10.67 25.4,11.18 25.4,12.57 26.93,14.1 U8.16
MISO1
  Top 0.254: U3.1 22.86,60.2 24.89,60.2 25.4,60.71 25.4,62.1 26.93,63.63 U2.16
MISO2
  Top 0.254: U9.1 22.86,109.73 24.89,109.73 25.4,110.24 25.4,111.63 26.93,113.16 U6.16
MOSI
  Top 0.254: U8.15 26.13,14.06 25.53,13.46 24.89,13.46 24.13,12.7 U17.4
MOSI1
  Top 0.254: U2.15 26.13,63.59 25.53,62.99 24.89,62.99 24.13,62.23 U3.4
MOSI2
  Top 0.254: U6.15 26.13,113.12 25.53,112.52 24.89,112.52 24.13,111.76 U9.4
N$1
  Top 0.381: F1.1 34.42,43.69
  Top 0.61: S1.20 54.13,47.02 52.07,44.96 38.1,44.96 36.83,43.69 34.42,43.69
N$2
  Top 0.254: R3.2 34.29,18.29 33.02,19.56 33.02,20.79 R2.2
  Top 0.305: 42.69,25.51 42.24,25.06 R1.1 33.06,23.83 R2.2
  Top 0.356: 42.44,25.26 42.69,25.51 D1.A
N$3
  Bottom 0.61: R14.P$1 R15.P$1 107.82,34.67 107.82,33.66 106.55,32.38 102.11,32.38 99.69,29.97 U$8.GND
N$4  (via drill 0.51)
  Top 0.305: 43.05,22.1 34.98,22.1 34.77,21.89 34.77,20.84 R2.1 34.77,20.81 34.77,19.79 35,19.56 v35.56,19.56
  Top 0.356: 43.05,22.1 C2.A
  Top 0.406: Q3.2 36.59,11.67 v35.56,12.7
  Bottom 0.356: v35.56,12.7 v35.56,19.56
N$5
  Top 0.61: R15.P$2 Q2.2
N$6
  Top 0.406: Q3.3 42.08,9.4 R5.1
N$7
  Top 0.61: S1.11 44.93,39.4 R6.P$1
N$8
  Top 0.61: R16.P$1 104.14,44.96 Q2.3
N$9
  Top 0.406: R5.2 48.31,9.4 Q1.1
N$10
  Top 0.61: D1.C 44.54,30.9 48.26,27.18 48.26,22.16 U7.2 U7.3 59.96,14.48 57.25,11.77 Q1.3
N$11
  Top 0.61: C4.1 87.61,47.24 D3.A | D2.C 86.34,41.15 C4.1 | R9.P$2 97.79,17.02 90.17,24.64 90.17,39.86 C4.1
N$12
  Top 0.61: D4.A 99.06,39.88 99.06,45.96 D3.C
  Bottom 0.61: C5.2 81.77,48.26 83.55,50.04 94.98,50.04 D3.C
N$14
  Top 0.61: U$8.VCC 68.58,23.37 R8.P$2
N$15  (via drill 0.51)
  Top 0.254: X1.D- 15.4,36.87 v15.24,36.7 | U10.16 25.25,39.64 v25.78,39.12
  Bottom 0.254: v15.24,36.7 23.37,36.7 v25.78,39.12
N$16
  Top 0.254: R18.2 34.29,67.82 33.02,69.09 33.02,70.32 R10.2
  Top 0.305: 42.69,75.04 42.24,74.59 R7.1 33.06,73.36 R10.2
  Top 0.356: 42.44,74.79 42.69,75.04 D5.A
N$17  (via drill 0.51)
  Top 0.254: X1.D+ 15.88,36.07 v15.24,35.43 | U10.15 25.43,40.29 v25.78,40.64
  Bottom 0.254: v15.24,35.43 14.61,35.43 13.97,36.07 13.97,39.37 15.11,40.51 25.65,40.51 v25.78,40.64
N$18
  Top 0.61: R9.P$1 U$7.C
N$19
  Top 0.254: LED1.A 13.74,23.48 R12.1
N$20
  Top 0.254: R13.1 26.35,26.76 LED2.C
N$21
  Top 0.254: U8.28 24.53,25.04 R13.2
N$22
  Top 0.61: U$7.A U$6.C
N$23
  Top 0.61: Q4.2 68.36,10.03 C1.2 71.88,9.82 U$6.A
N$24  (via drill 0.51)
  Top 0.305: 43.05,71.63 34.98,71.63 34.77,71.42 34.77,70.37 R10.1 34.77,70.34 34.77,69.32 35,69.09 v35.56,69.09
  Top 0.356: 43.05,71.63 C13.A
  Top 0.406: Q6.2 36.59,61.2 v35.56,62.23
  Bottom 0.356: v35.56,62.23 v35.56,69.09
N$25
  Top 0.406: Q6.3 42.08,58.93 R20.1
N$26
  Top 0.406: R20.2 48.31,58.93 Q5.1
N$27
  Top 0.61: D5.C 44.54,80.43 48.26,76.71 48.26,71.69 U1.2 U1.3 59.96,64.01 57.25,61.3 Q5.3
N$28
  Top 0.61: C8.1 87.61,96.77 D7.A | D6.C 86.34,90.68 C8.1 | R30.P$2 97.79,66.55 90.17,74.17 90.17,89.39 C8.1
N$29
  Top 0.61: D8.A 99.06,89.41 99.06,95.49 D7.C
  Bottom 0.61: C9.2 81.77,97.79 83.55,99.57 94.98,99.57 D7.C
N$30
  Top 0.61: U$12.VCC 68.58,72.9 R21.P$2
N$31
  Top 0.254: R23.1 26.35,76.29 LED3.C
N$32
  Top 0.254: U2.28 24.53,74.57 R23.2
N$33  (via drill 0.51)
  Top 0.254: X2.D- 15.4,86.4 v15.24,86.23 | U4.16 25.25,89.17 v25.78,88.65
  Bottom 0.254: v15.24,86.23 23.37,86.23 v25.78,88.65
N$34  (via drill 0.51)
  Top 0.254: X2.D+ 15.88,85.6 v15.24,84.96 | U4.15 25.43,89.82 v25.78,90.17
  Bottom 0.254: v15.24,84.96 14.61,84.96 13.97,85.6 13.97,88.9 15.11,90.04 25.65,90.04 v25.78,90.17
N$35
  Top 0.254: LED4.A 13.74,73.01 R24.1
N$36
  Top 0.61: S4.11 44.93,88.93 R25.P$1
N$37
  Top 0.381: F2.1 34.42,93.22
  Top 0.61: S4.20 54.13,96.55 52.07,94.49 38.1,94.49 36.83,93.22 34.42,93.22
N$38
  Bottom 0.61: R26.P$1 R27.P$1 107.82,84.2 107.82,83.19 106.55,81.92 102.11,81.92 99.69,79.5 U$12.GND
N$39
  Top 0.61: R27.P$2 Q8.2
N$40
  Top 0.61: R28.P$1 104.14,94.49 Q8.3
N$41
  Top 0.61: R30.P$1 U$14.C
N$42
  Top 0.61: U$14.A U$13.C
N$43
  Top 0.61: Q7.2 68.36,59.56 C18.2 71.88,59.35 U$13.A
N$45
  Top 0.254: R33.2 34.29,117.35 33.02,118.62 33.02,119.85 R32.2
  Top 0.305: 42.69,124.57 42.24,124.12 R31.1 33.06,122.89 R32.2
  Top 0.356: 42.44,124.32 42.69,124.57 D9.A
N$46  (via drill 0.51)
  Top 0.305: 43.05,121.16 34.98,121.16 34.77,120.95 34.77,119.9 R32.1 34.77,119.87 34.77,118.85 35,118.62 v35.56,118.62
  Top 0.356: 43.05,121.16 C22.A
  Top 0.406: Q10.2 36.59,110.73 v35.56,111.76
  Bottom 0.356: v35.56,111.76 v35.56,118.62
N$47
  Top 0.406: Q10.3 42.08,108.46 R35.1
N$48
  Top 0.406: R35.2 48.31,108.46 Q9.1
N$49
  Top 0.61: D9.C 44.54,129.96 48.26,126.24 48.26,121.22 U5.2 U5.3 59.96,113.54 57.25,110.83 Q9.3
N$50
  Top 0.61: C19.1 87.61,146.3 D11.A | D10.C 86.34,140.21 C19.1 | R45.P$2 97.79,116.08 90.17,123.7 90.17,138.92 C19.1
N$51
  Top 0.61: D12.A 99.06,138.94 99.06,145.02 D11.C
  Bottom 0.61: C20.2 81.77,147.32 83.55,149.1 94.98,149.1 D11.C
N$52
  Top 0.61: U$19.VCC 68.58,122.43 R36.P$2
N$53
  Top 0.254: R38.1 26.35,125.82 LED5.C
N$54
  Top 0.254: U6.28 24.53,124.1 R38.2
N$55  (via drill 0.51)
  Top 0.254: X3.D- 15.4,135.93 v15.24,135.76 | U11.16 25.25,138.7 v25.78,138.18
  Bottom 0.254: v15.24,135.76 23.37,135.76 v25.78,138.18
N$56  (via drill 0.51)
  Top 0.254: X3.D+ 15.88,135.13 v15.24,134.49 | U11.15 25.43,139.35 v25.78,139.7
  Bottom 0.254: v15.24,134.49 14.61,134.49 13.97,135.13 13.97,138.43 15.11,139.57 25.65,139.57 v25.78,139.7
N$57
  Top 0.254: LED6.A 13.74,122.54 R39.1
N$58
  Top 0.61: S6.11 44.93,138.46 R40.P$1
N$59
  Top 0.381: F3.1 34.42,142.75
  Top 0.61: S6.20 54.13,146.08 52.07,144.02 38.1,144.02 36.83,142.75 34.42,142.75
N$60
  Bottom 0.61: R41.P$1 R42.P$1 107.82,133.73 107.82,132.72 106.55,131.44 102.11,131.44 99.69,129.03 U$19.GND
N$61
  Top 0.61: R42.P$2 Q12.2
N$62
  Top 0.61: R43.P$1 104.14,144.02 Q12.3
N$63
  Top 0.61: R45.P$1 U$21.C
N$64
  Top 0.61: U$21.A U$20.C
N$65
  Top 0.61: Q11.2 68.36,109.09 C27.2 71.88,108.88 U$20.A
OSC1
  Top 0.61: U7.4 59.96,34.18 66.93,41.15 D2.A
  Bottom 0.61: D2.A 72.12,47.24 C5.1
OSC2  (via drill 0.51)
  Top 0.406: R3.1 42.86,13.63 | 42.86,13.63 44.45,13.63 R4.2 | Q3.1 42.86,13.63
  Top 0.61: v55.88,10.67 57.78,10.67 61.59,14.48 63.5,14.48 64.77,13.21 Q4.1 68.16,11.94 C1.1 | R4.2 44.87,11.81 v44.96,11.81
  Bottom 0.61: v55.88,10.67 46.1,10.67 v44.96,11.81
OSC3
  Top 0.61: U1.4 59.96,83.71 66.93,90.68 D6.A
  Bottom 0.61: D6.A 72.12,96.77 C9.1
OSC4  (via drill 0.51)
  Top 0.406: R18.1 42.86,63.16 | 42.86,63.16 44.45,63.16 R19.2 | Q6.1 42.86,63.16
  Top 0.61: v55.88,60.2 57.78,60.2 61.59,64.01 63.5,64.01 64.77,62.74 Q7.1 68.16,61.47 C18.1 | R19.2 44.87,61.34 v44.96,61.34
  Bottom 0.61: v55.88,60.2 46.1,60.2 v44.96,61.34
OSC5
  Top 0.61: U5.4 59.96,133.24 66.93,140.21 D10.A
  Bottom 0.61: D10.A 72.12,146.3 C20.1
OSC6  (via drill 0.51)
  Top 0.406: R33.1 42.86,112.69 | 42.86,112.69 44.45,112.69 R34.2 | Q10.1 42.86,112.69
  Top 0.61: v55.88,109.73 57.78,109.73 61.59,113.54 63.5,113.54 64.77,112.27 Q11.1 68.16,111 C27.1 | R34.2 44.87,110.87 v44.96,110.87
  Bottom 0.61: v55.88,109.73 46.1,109.73 v44.96,110.87
OUT  (via drill 0.51)
  Top 0.254: 16.07,29.27 16.64,28.7 20.19,28.7 21.34,27.56 U8.32 | 16.07,29.27 14.99,30.35 14.99,32.26 13.34,33.91 13.34,38.23 14.86,39.75 14.86,42.04 17.78,44.96 26.67,44.96 29.21,47.5 JP2.3 | v16.51,29.72 16.07,29.27
  Bottom 0.254: 113.03,44.96 113.03,12.45 108.97,8.38 36.2,8.38 33.15,11.43 33.15,20.45 23.88,29.72 v16.51,29.72 | 113.03,44.96 113.03,45.99 111.52,47.5 Q2.1 | R17.P$2 115.57,43.69 114.3,44.96 113.03,44.96
OUT1  (via drill 0.51)
  Top 0.254: 16.07,78.8 16.64,78.23 20.19,78.23 21.34,77.09 U2.32 | 16.07,78.8 14.99,79.88 14.99,81.79 13.34,83.44 13.34,87.76 14.86,89.28 14.86,91.57 17.78,94.49 26.67,94.49 29.21,97.03 JP1.3 | v16.51,79.25 16.07,78.8
  Bottom 0.254: 113.03,94.49 113.03,61.98 108.97,57.91 36.2,57.91 33.15,60.96 33.15,69.98 23.88,79.25 v16.51,79.25 | 113.03,94.49 113.03,95.52 111.52,97.03 Q8.1 | R29.P$2 115.57,93.22 114.3,94.49 113.03,94.49
OUT2  (via drill 0.51)
  Top 0.254: 16.07,128.33 16.64,127.76 20.19,127.76 21.34,126.62 U6.32 | 16.07,128.33 14.99,129.41 14.99,131.32 13.34,132.97 13.34,137.29 14.86,138.81 14.86,141.1 17.78,144.02 26.67,144.02 29.21,146.56 JP3.3 | v16.51,128.78 16.07,128.33
  Bottom 0.254: 113.03,144.02 113.03,111.51 108.97,107.44 36.2,107.44 33.15,110.49 33.15,119.51 23.88,128.78 v16.51,128.78 | 113.03,144.02 113.03,145.05 111.52,146.56 Q12.1 | R44.P$2 115.57,142.75 114.3,144.02 113.03,144.02
RST  (via drill 0.51)
  Top 0.254: S2.4 S2.3 v15.88,11.81 | U8.29 23.73,20.97 v23.75,20.95 | v31.24,20.07 31.24,23.11 33.02,24.89 33.02,26.67 30.99,28.7 30.99,29.88 C3.1
  Top 0.356: U17.5 29.21,9.4 30.48,10.67 R11.1
  Bottom 0.254: U17.5 25.4,10.67 17.02,10.67 v15.88,11.81 | v15.88,11.81 11.18,16.51 11.18,43.05 19.43,51.31 JP2.6 | v31.24,20.07 30.86,19.68 23.88,19.68 23.75,19.56 | v23.75,20.95 23.75,19.56 | 23.75,19.56 23.75,19.18 16.51,11.94 16,11.94 v15.88,11.81
RST1  (via drill 0.51)
  Top 0.254: S3.4 S3.3 v15.88,61.34 | U2.29 23.73,70.5 v23.75,70.48 | v31.24,69.6 31.24,72.64 33.02,74.42 33.02,76.2 30.99,78.23 30.99,79.41 C17.1
  Top 0.356: U3.5 29.21,58.93 30.48,60.2 R22.1
  Bottom 0.254: U3.5 25.4,60.2 17.02,60.2 v15.88,61.34 | v15.88,61.34 11.18,66.04 11.18,92.58 19.43,100.84 JP1.6 | v31.24,69.6 30.86,69.22 23.88,69.22 23.75,69.09 | v23.75,70.48 23.75,69.09 | 23.75,69.09 23.75,68.71 16.51,61.47 16,61.47 v15.88,61.34
RST2  (via drill 0.51)
  Top 0.254: S5.4 S5.3 v15.88,110.87 | U6.29 23.73,120.03 v23.75,120.02 | v31.24,119.13 31.24,122.17 33.02,123.95 33.02,125.73 30.99,127.76 30.99,128.94 C26.1
  Top 0.356: U9.5 29.21,108.46 30.48,109.73 R37.1
  Bottom 0.254: U9.5 25.4,109.73 17.02,109.73 v15.88,110.87 | v15.88,110.87 11.18,115.57 11.18,142.11 19.43,150.37 JP3.6 | v31.24,119.13 30.86,118.75 23.88,118.75 23.75,118.62 | v23.75,120.02 23.75,118.62 | 23.75,118.62 23.75,118.24 16.51,111 16,111 v15.88,110.87
SCK
  Top 0.254: U17.3 24.64,9.4 25.91,10.67 27.94,10.67 28.42,11.15 U8.17
SCK1
  Top 0.254: U3.3 24.64,58.93 25.91,60.2 27.94,60.2 28.42,60.68 U2.17
SCK2
  Top 0.254: U9.3 24.64,108.46 25.91,109.73 27.94,109.73 28.42,110.21 U6.17
VCC
  Top 0.61: 34.29,33.53 R1.2 | 34.29,33.53 F1.2 33.15,41.02 31.75,42.42 31.75,46.23 37.21,51.69 62.23,51.69 62.61,51.31 100.33,51.31 101.6,50.04 101.6,37.34 R16.P$2 | U7.1 49.26,31.26 46.99,33.53 34.29,33.53
  Bottom 0.61: Q4.3 58.42,11.94 54.61,15.75 50.8,15.75 45.72,20.83 45.72,27.12 U7.1
VCC1
  Top 0.61: 34.29,83.06 R7.2 | 34.29,83.06 F2.2 33.15,90.55 31.75,91.95 31.75,95.76 37.21,101.22 62.23,101.22 62.61,100.84 100.33,100.84 101.6,99.57 101.6,86.87 R28.P$2 | U1.1 49.26,80.79 46.99,83.06 34.29,83.06
  Bottom 0.61: Q7.3 58.42,61.47 54.61,65.28 50.8,65.28 45.72,70.36 45.72,76.65 U1.1
VCC2
  Top 0.61: 34.29,132.59 R31.2 | 34.29,132.59 F3.2 33.15,140.08 31.75,141.48 31.75,145.29 37.21,150.75 62.23,150.75 62.61,150.37 100.33,150.37 101.6,149.1 101.6,136.4 R43.P$2 | U5.1 49.26,130.32 46.99,132.59 34.29,132.59
  Bottom 0.61: Q11.3 58.42,111 54.61,114.81 50.8,114.81 45.72,119.89 45.72,126.18 U5.1

## Text on the board
Bottom: v40 | v40 | v40
Dimension: Route Out | Route Out | Route Out | Route Out | ROUTE OUT | ROUTE OUT | ROUTE OUT | Route Out | ROUTE OUT | ROUTE OUT | ROUTE OUT | Route Out | Route Out | Route Out | Route Out | ROUTE OUT | ROUTE OUT | ROUTE OUT | Route Out | ROUTE OUT | ROUTE OUT | ROUTE OUT | Route Out | Route Out | Route Out | Route Out | ROUTE OUT | ROUTE OUT | ROUTE OUT | Route Out | ROUTE OUT | Route Out | ROUTE OUT | ROUTE OUT
tPlace: RST | RX | TX | OUT | GND | 5V | TUBE / POWER | OFF | ON | HIGH | VOLTAGE | POWER | COUNTER | RESET | GEIGER / COUNTER | RST | RX | TX | OUT | GND | 5V | TUBE / POWER | OFF | ON | HIGH | VOLTAGE | POWER | COUNTER | RESET | GEIGER / COUNTER | RST | RX | TX | OUT | GND | 5V | TUBE / POWER | OFF | ON | HIGH | VOLTAGE | POWER | COUNTER | RESET | GEIGER / COUNTER
bPlace: HIGH | VOLTAGE | HIGH | VOLTAGE | HIGH | VOLTAGE